# EAGLE board CT_schematic (EAGLE 7.6.0)

Size 100 x 80 mm. Coordinates in mm from the lower left corner, seen from the top.
Outline: 0,0 100,0 100,80 0,80 0,0
Copper layers (1*16): Top 0.035mm / dielectric 1.5mm / Bottom 0.035mm
Design rules "default": minimum track width 10mil, minimum drill 24mil, track to track 8mil, track to pad 8mil, pad to pad 8mil, via to via 8mil, smd to smd 8mil, copper to edge 40mil, drill to drill 8mil, minimum pad ring 10mil, minimum via ring 8mil, stop-mask expansion 4mil, vias tented up to drill 0mil, thermal gap 10mil

## Footprints (pad centres in the part's own frame; a part is rotated, then mirrored left to right if it is on the bottom)
C0603 = smd 0.8 x 0.8: 1 -0.762,0; 2 0.762,0
C0402 = smd 0.5 x 0.5: 1 -0.508,0; 2 0.508,0
C0805 = smd 1.2 x 1.3: 1 -1.016,0; 2 1.016,0
C1210 = smd 1.2 x 2.5: 1 -1.524,0; 2 1.524,0
C1206 = smd 1.3 x 1.6: 1 -1.524,0; 2 1.524,0
L0603 = smd 0.8 x 0.8: 1 -0.762,0; 2 0.762,0
DR1040 = smd 1.6 x 3.2: 1 -4.458,0; 2 4.458,0
R0603 = smd 0.8 x 0.8: 1 -0.762,0; 2 0.762,0
UFBGA64 = smd 0.2 x 0.2: A1 -1.75,1.75; A2 -1.25,1.75; A3 -0.75,1.75; A4 -0.25,1.75; A5 0.25,1.75; A6 0.75,1.75; A7 1.25,1.75; A8 1.75,1.75; B1 -1.75,1.25; B2 -1.25,1.25; B3 -0.75,1.25; B4 -0.25,1.25; B5 0.25,1.25; B6 0.75,1.25; B7 1.25,1.25; B8 1.75,1.25; C1 -1.75,0.75; C2 -1.25,0.75; C3 -0.75,0.75; C4 -0.25,0.75; C5 0.25,0.75; C6 0.75,0.75; C7 1.25,0.75; C8 1.75,0.75; D1 -1.75,0.25; D2 -1.25,0.25; D3 -0.75,0.25; D4 -0.25,0.25; D5 0.25,0.25; D6 0.75,0.25; D7 1.25,0.25; D8 1.75,0.25; E1 -1.75,-0.25; E2 -1.25,-0.25; E3 -0.75,-0.25; E4 -0.25,-0.25; E5 0.25,-0.25; E6 0.75,-0.25; E7 1.25,-0.25; E8 1.75,-0.25; F1 -1.75,-0.75; F2 -1.25,-0.75; F3 -0.75,-0.75; F4 -0.25,-0.75; F5 0.25,-0.75; F6 0.75,-0.75; F7 1.25,-0.75; F8 1.75,-0.75; G1 -1.75,-1.25; G2 -1.25,-1.25; G3 -0.75,-1.25; G4 -0.25,-1.25; G5 0.25,-1.25; G6 0.75,-1.25; G7 1.25,-1.25; G8 1.75,-1.25; H1 -1.75,-1.75; H2 -1.25,-1.75; H3 -0.75,-1.75; H4 -0.25,-1.75; H5 0.25,-1.75; H6 0.75,-1.75; H7 1.25,-1.75; H8 1.75,-1.75
SOIC-8 = smd 1.6 x 0.6: 1 -2.7,1.905 | smd 1.55 x 0.6: 2 -2.7,0.635; 3 -2.7,-0.635; 4 -2.7,-1.905; 5 2.7,-1.905; 6 2.7,-0.635; 7 2.7,0.635; 8 2.7,1.905
SOT-23-8 = smd 0.4 x 1.2: 1 -0.975,-1.3; 2 -0.325,-1.3; 3 0.325,-1.3; 4 0.975,-1.3; 5 0.975,1.3; 6 0.325,1.3; 7 -0.325,1.3; 8 -0.975,1.3
182-009-MALE = drill 1.194 pad 1.524 octagon: 1 -5.537,10.923; 2 -2.769,10.923; 3 0,10.923; 4 2.769,10.923; 5 5.537,10.923; 6 -4.153,8.08; 7 -1.384,8.08; 8 1.384,8.08; 9 4.153,8.08 | hole 3.048: -12.446,9.501; 12.446,9.501
TDFN-8/6MM = smd 0.3 x 0.75: 1 0,0; 2 0.5,0; 3 1,0; 4 1.5,0; 5 1.5,3; 6 1,3; 7 0.5,3; 8 0,3
ABS07-32.768KHZ-7-T = smd 1.1 x 2.4: 1 -2.5,0; 2 0,0
ABLS-25.000MHZ-B2F-T = smd 5.6 x 2.8: 1 -3.81,0; 2 5.69,0
TSOT-23-5 = smd 1.3 x 0.62: 1 -1.31,0.95; 2 -1.31,0; 3 -1.31,-0.95; 4 1.31,-0.95; 5 1.31,0.95
SOIC-8_EP = smd 1.6 x 0.533: 1 -2.921,1.905; 2 -2.921,0.635; 3 -2.921,-0.635; 4 -2.921,-1.905; 5 2.921,-1.905; 6 2.921,-0.635; 7 2.921,0.635; 8 2.921,1.905 | smd 2.54 x 3.302: EPAD 0,0 | drill 0.406 pad 0.406: P$1 -0.508,0.635; P$2 0.381,0.635; P$3 -0.508,-0.635; P$4 0.381,-0.635
DFN8_2X3MC = smd 0.813 x 0.305: 1 -1.398,0.75; 2 -1.398,0.25; 3 -1.398,-0.25; 4 -1.398,-0.75; 5 1.398,-0.75; 6 1.398,-0.25; 7 1.398,0.25; 8 1.398,0.75 | smd 1.753 x 1.549: 9 0,0
JST-2-SMD = smd 1 x 4.6: 1 -1,-3.7; 2 1,-3.7 | smd 1.6 x 3.4: NC1 -3.4,1.5; NC2 3.4,1.5
FCI_10118193-0001LF = smd 0.4 x 1.35: 1 -1.3,2.675; 2 -0.65,2.675; 3 0,2.675; 4 0.65,2.675; 5 1.3,2.675 | smd 1.6 x 1.4: 6 -3.2,2.45; 7 3.2,2.45 | smd 1.9 x 1.9: 8 -1.2,0; 9 1.2,0 | hole 0.5: -3.3,0; 3.3,0
SON-6 = smd 0.55 x 0.3: 1 -0.355,0.5 | smd 0.52 x 0.3: 2 -0.37,0; 3 -0.37,-0.5; 4 0.37,-0.5; 5 0.37,0; 6 0.37,0.5
DCU0008A_N = smd 0.5 x 0.3: 1 -1.6,0.75; 2 -1.6,0.25; 3 -1.6,-0.25; 4 -1.6,-0.75; 5 1.6,-0.75; 6 1.6,-0.25; 7 1.6,0.25; 8 1.6,0.75
SW_4-1437565-2 = smd 1.4 x 2.1: 1 -2.23,4.55; 2 -2.23,-4.55; 3 2.23,4.55; 4 2.23,-4.55
LGM67K-G1J2-24-Z = smd 0.8 x 1.4: A -2,0; C 0,0
NC7SZ125M5X = smd 1.3 x 0.7: 1 -1.3,0.95; 2 -1.3,0; 3 -1.3,-0.95; 4 1.3,-0.95; 5 1.3,0.95

## Placement (x,y rotation side)
C1  1e-06  [C0603]  -38.1,64.77 0 top  (outside the outline)
C2  1e-07  [C0603]  -41.91,64.77 0 top  (outside the outline)
C3  1e-07  [C0603]  -45.72,64.77 0 top  (outside the outline)
C4  1e-07  [C0603]  -49.53,64.77 0 top  (outside the outline)
C5  1e-07  [C0603]  -53.34,64.77 0 top  (outside the outline)
C6  4.7e-06  [C0603]  -34.29,64.77 0 top  (outside the outline)
C7  1e-07  [C0603]  -57.15,64.77 0 top  (outside the outline)
C8  1e-07  [C0603]  -60.96,64.77 0 top  (outside the outline)
C9  1e-08  [C0603]  -64.77,64.77 0 top  (outside the outline)
C10  1e-06  [C0603]  -68.58,64.77 0 top  (outside the outline)
C11  1e-11  [C0402]  -49.53,69.85 0 top  (outside the outline)
C12  1e-11  [C0402]  -53.34,69.85 0 top  (outside the outline)
C13  1e-11  [C0402]  -57.15,69.85 0 top  (outside the outline)
C14  1e-11  [C0402]  -60.96,69.85 0 top  (outside the outline)
C15  1e-08  [C0402]  -64.77,69.85 0 top  (outside the outline)
C16  1e-07  [C0402]  -68.58,69.85 0 top  (outside the outline)
C17  1e-08  [C0402]  -72.39,69.85 0 top  (outside the outline)
C18  1e-08  [C0402]  -15.24,74.93 0 top  (outside the outline)
C19  1e-05  [C0805]  -45.72,53.34 0 top  (outside the outline)
C20  1e-05  [C0805]  -50.8,53.34 0 top  (outside the outline)
C21  1e-05  [C1210]  -57.15,45.72 0 top  (outside the outline)
C22  1e-05  [C1210]  -63.5,45.72 0 top  (outside the outline)
C23  1e-05  [C1210]  -69.85,45.72 0 top  (outside the outline)
C24  1e-05  [C1210]  -16.51,53.34 0 top  (outside the outline)
C25  1e-07  [C0402]  -19.05,74.93 0 top  (outside the outline)
C26  1e-05  [C1206]  -22.86,53.34 0 top  (outside the outline)
C27  1e-05  [C1206]  -29.21,53.34 0 top  (outside the outline)
C28  1e-08  [C0402]  -22.86,74.93 0 top  (outside the outline)
C29  1e-07  [C0402]  -26.67,74.93 0 top  (outside the outline)
C30  1e-08  [C0402]  -30.48,74.93 0 top  (outside the outline)
C31  1e-07  [C0402]  -34.29,74.93 0 top  (outside the outline)
C32  1e-08  [C0402]  -38.1,74.93 0 top  (outside the outline)
F1  240.0  [L0603]  -72.39,64.77 0 top  (outside the outline)
I1  5.2e-06  [DR1040]  -19.05,27.94 0 top  (outside the outline)
R2  1000.0  [R0603]  -15.24,69.85 0 top  (outside the outline)
R4  4700.0  [R0603]  -19.05,69.85 0 top  (outside the outline)
R5  2200.0  [R0603]  -22.86,69.85 0 top  (outside the outline)
R6  2200.0  [R0603]  -26.67,69.85 0 top  (outside the outline)
R7  2200.0  [R0603]  -30.48,69.85 0 top  (outside the outline)
R8  2200.0  [R0603]  -34.29,69.85 0 top  (outside the outline)
R9  10000.0  [R0603]  -35.56,59.69 0 top  (outside the outline)
R10  10000.0  [R0603]  -40.64,59.69 0 top  (outside the outline)
R11  10000.0  [R0603]  -45.72,59.69 0 top  (outside the outline)
R12  10000.0  [R0603]  -50.8,59.69 0 top  (outside the outline)
R13  10000.0  [R0603]  -55.88,59.69 0 top  (outside the outline)
R14  120.0  [R0603]  -38.1,69.85 0 top  (outside the outline)
R15  10000.0  [R0603]  -60.96,59.69 0 top  (outside the outline)
R16  10000.0  [R0603]  -66.04,59.69 0 top  (outside the outline)
R17  10000.0  [R0603]  -71.12,59.69 0 top  (outside the outline)
R18  490000.0  [R0603]  -15.24,59.69 0 top  (outside the outline)
R19  1000000.0  [R0603]  -71.12,53.34 0 top  (outside the outline)
R20  4031.5447154472  [R0603]  -66.04,53.34 0 top  (outside the outline)
R21  2200.0  [R0603]  -41.91,69.85 0 top  (outside the outline)
R22  10000.0  [R0603]  -15.24,64.77 0 top  (outside the outline)
R23  10000.0  [R0603]  -20.32,64.77 0 top  (outside the outline)
R24  82000.0  [R0603]  -25.4,64.77 0 top  (outside the outline)
R25  300000.0  [R0603]  -20.32,59.69 0 top  (outside the outline)
R26  120000.0  [R0603]  -25.4,59.69 0 top  (outside the outline)
R27  2000.0  [R0603]  -45.72,69.85 0 top  (outside the outline)
R28  10000.0  [R0603]  -30.48,64.77 0 top  (outside the outline)
R29  200000.0  [R0603]  -30.48,59.69 0 top  (outside the outline)
U1  stm32f098rch7  [UFBGA64]  -36.83,38.1 0 top  (outside the outline)
U2  AT25128B-SSHL-T  [SOIC-8]  -66.04,27.94 0 top  (outside the outline)
U3  MAX3051EKA+T  [SOT-23-8]  -34.29,53.34 0 top  (outside the outline)
U4  182-009-113R531  [182-009-MALE]  -36.83,6.35 0 top  (outside the outline)
U5  24AA08T-I/MNY  [TDFN-8/6MM]  -50.8,26.67 0 top  (outside the outline)
U6  24AA1025T-I/SN  [SOIC-8]  -22.86,38.1 0 top  (outside the outline)
U7  ABS07-32.768KHZ-7-T  [ABS07-32.768KHZ-7-T]  -27.94,46.99 0 top  (outside the outline)
U8  ABLS-25.000MHZ-B2F-T  [ABLS-25.000MHZ-B2F-T]  -64.77,38.1 0 top  (outside the outline)
U9  ltc3406es5  [TSOT-23-5]  -55.88,52.07 0 top  (outside the outline)
U10  MIC5234YME  [SOIC-8_EP]  -36.83,45.72 0 top  (outside the outline)
U11  MCP73831T-2ACI/MC  [DFN8_2X3MC]  -62.23,73.66 0 top  (outside the outline)
U12  S2B-PH-SM4-TB(LF)(SN)  [JST-2-SMD]  -34.29,29.21 0 top  (outside the outline)
U13  10118193-0001LF  [FCI_10118193-0001LF]  -45.72,36.83 0 top  (outside the outline)
U14  TPS3895ADRYR  [SON-6]  -55.88,73.66 0 top  (outside the outline)
U15  LSF0102DCTR  [DCU0008A_N]  -50.8,73.66 0 top  (outside the outline)
U16  4-1437565-2  [SW_4-1437565-2]  -67.31,6.35 0 top  (outside the outline)
U17  Q65110A2395  [LGM67K-G1J2-24-Z]  -45.72,45.72 0 top  (outside the outline)
U18  nc7sz125m5x  [NC7SZ125M5X]  -39.37,53.34 0 top  (outside the outline)

## Library data of the parts
C1-C32 F1 I1 R2 R4-R29 U1-U18 = circuit_tree

## Nets
CLK_CRYSTAL_U1_A1: C11.1 U1.A1 U7.1
CLK_CRYSTAL_U1_B1: C12.1 U1.B1 U7.2
CLK_CRYSTAL_U1_C1: C13.1 U1.C1 U8.1
CLK_CRYSTAL_U1_D1: C14.1 U1.D1 U8.2
GND: C1.2 C2.2 C3.2 C4.2 C5.2 C6.2 C7.2 C8.2 C9.2 C10.2 C11.2 C12.2 C13.2 C14.2 C15.2 C16.2 C17.2 C18.2 C19.2 C20.1 C20.2 C21.2 C22.2 C23.2 C24.2 C25.2 C26.2 C27.2 C28.2 C29.2 C30.2 C31.2 C32.2 R2.2 R9.2 R10.2 R16.2 R18.2 R21.2 R24.2 R26.2 R27.2 U1.C2 U1.D4 U1.D5 U1.D6 U1.F1 U2.4 U3.2 U3.8 U4.5 U5.4 U5.7 U6.4 U6.7 U9.2 U10.7 U10.EPAD U11.6 U11.9 U12.2 U13.5 U13.6 U13.7 U13.8 U13.9 U14.2 U15.1 U17.C U18.1 U18.3
INPUT_USBPOWER_5V: C26.1 R28.2 U11.1 U11.2 U13.1
NET_U1_B4: R9.1 U1.B4
NET_U1_B8: R8.1 U1.B8 U6.5
NET_U1_C3: R6.1 U1.C3 U5.5
NET_U1_C7: R5.1 U1.C7 U5.6
NET_U1_C8: R7.1 U1.C8 U6.6
NET_U1_E1: R4.1 U1.E1 U18.4
NET_U1_G6: R10.1 U1.G6
NET_U1_H1: C9.1 C10.1 F1.1 U1.H1
NET_U1_H7: U17.A
NET_U1_H8: U16.3 U16.4
NET_U2_3: R11.1 U2.3
NET_U2_7: R13.1 U2.7
NET_U3_6: R14.2 U3.6
NET_U4_2: R14.2 U3.6 U4.2
NET_U4_3: R14.1 U3.7 U4.3
NET_U6_1: R16.1 U6.1
NET_U6_2: R17.1 U6.2
NET_U6_3: R15.1 U6.3
NET_U9_1: U9.1
NET_U9_3: I1.1 U9.3
NET_U9_5: R18.1 R19.1 U9.5
NET_U9_ATNET_3: I1.2 R19.2
NET_U10_4: R20.2 R21.1 U10.4
NET_U11_5: R28.1 U11.5
NET_U11_8: R27.1 U11.8
NET_U14_1: R23.1 R24.1 U14.1
NET_U14_3: R25.2 R26.1 U14.3
NET_U14_4: R22.1 U14.4 U18.2
NET_U15_8: R29.1 U15.8
NET_U16_1: R2.1 U16.1 U16.2
PROC_CAN_RX_TOIOBUF: U15.4
PROC_CAN_RX_TOXCVR: U3.4 U15.5
PROC_CAN_TX_TOIOBUF: U15.3
PROC_CAN_TX_TOXCVR: U3.1 U15.6
PROC_SPI1_MISO: U1.A4 U2.2
PROC_SPI1_MOSI: U1.C4 U2.5
PROC_SPI1_NSS: R12.1 U1.A6 U2.1
PROC_SPI1_SCK: U1.A5 U2.6
VCC_S1_3V7: C19.1 C21.1 C22.1 C27.1 U9.4 U10.5 U10.8 U11.3 U11.4 U12.1
VCC_TIER1_1V8: C1.1 C2.1 C3.1 C4.1 C5.1 C6.1 C7.1 C8.1 C15.1 C17.1 C18.1 C20.2 C25.1 C30.1 C31.1 C32.1 F1.2 I1.2 R4.2 R5.2 R6.2 R7.2 R8.2 R11.2 R12.2 R13.2 R15.2 R17.2 R19.2 R22.2 R23.2 R25.1 U1.B2 U1.D2 U1.E4 U1.E5 U1.E6 U2.8 U5.8 U6.8 U14.6 U15.2 U18.5
VCC_TIER1_3V3: C16.1 C23.1 C24.1 C28.1 C29.1 R20.1 R29.2 U3.3 U10.1 U15.7

## Tracks (layer width: path | path; a pad name or v marks a point on that pad's centre or on a via)
CLK_CRYSTAL_U1_A1  (2 unrouted)
CLK_CRYSTAL_U1_B1  (2 unrouted)
CLK_CRYSTAL_U1_C1  (2 unrouted)
CLK_CRYSTAL_U1_D1  (2 unrouted)
GND  (70 unrouted)
INPUT_USBPOWER_5V  (4 unrouted)
NET_U1_B4  (1 unrouted)
NET_U1_B8  (2 unrouted)
NET_U1_C3  (2 unrouted)
NET_U1_C7  (2 unrouted)
NET_U1_C8  (2 unrouted)
NET_U1_E1  (2 unrouted)
NET_U1_G6  (1 unrouted)
NET_U1_H1  (3 unrouted)
NET_U1_H8  (1 unrouted)
NET_U2_3  (1 unrouted)
NET_U2_7  (1 unrouted)
NET_U3_6  (1 unrouted)
NET_U4_2  (2 unrouted)
NET_U4_3  (2 unrouted)
NET_U6_1  (1 unrouted)
NET_U6_2  (1 unrouted)
NET_U6_3  (1 unrouted)
NET_U9_3  (1 unrouted)
NET_U9_5  (2 unrouted)
NET_U9_ATNET_3  (1 unrouted)
NET_U10_4  (2 unrouted)
NET_U11_5  (1 unrouted)
NET_U11_8  (1 unrouted)
NET_U14_1  (2 unrouted)
NET_U14_3  (2 unrouted)
NET_U14_4  (2 unrouted)
NET_U15_8  (1 unrouted)
NET_U16_1  (2 unrouted)
PROC_CAN_RX_TOXCVR  (1 unrouted)
PROC_CAN_TX_TOXCVR  (1 unrouted)
PROC_SPI1_MISO  (1 unrouted)
PROC_SPI1_MOSI  (1 unrouted)
PROC_SPI1_NSS  (2 unrouted)
PROC_SPI1_SCK  (1 unrouted)
VCC_S1_3V7  (9 unrouted)
VCC_TIER1_1V8  (42 unrouted)
VCC_TIER1_3V3  (9 unrouted)